# Altium PCB Trottinette_Telemetrie_PCB_2L.PcbDoc
Units mm, origin at the board's own origin, x right, y up, seen from the top; angles counter-clockwise.
Board outline 53 x 36.25 mm, 2 copper layers (Top, Bottom), stack 1.54 mm thick; 43 components, 40 nets, 211 pads, 59 vias.
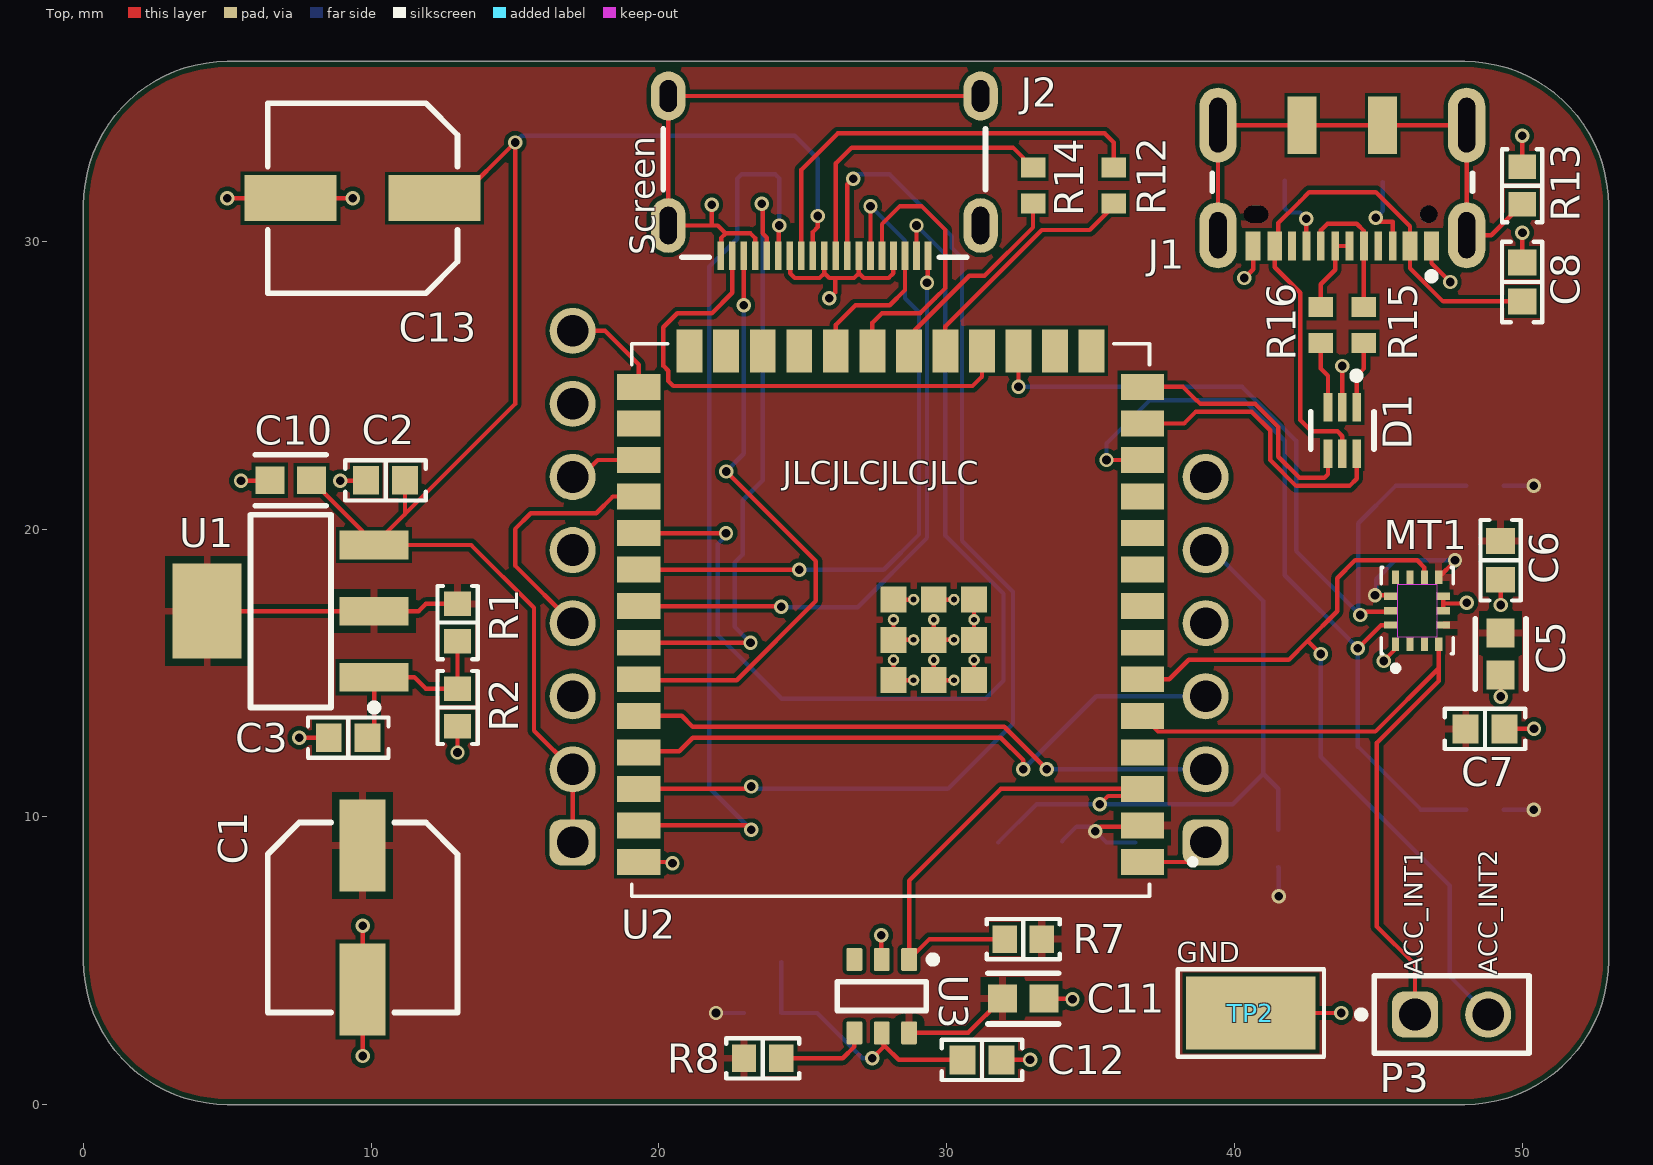
[diagram p0: Top view]
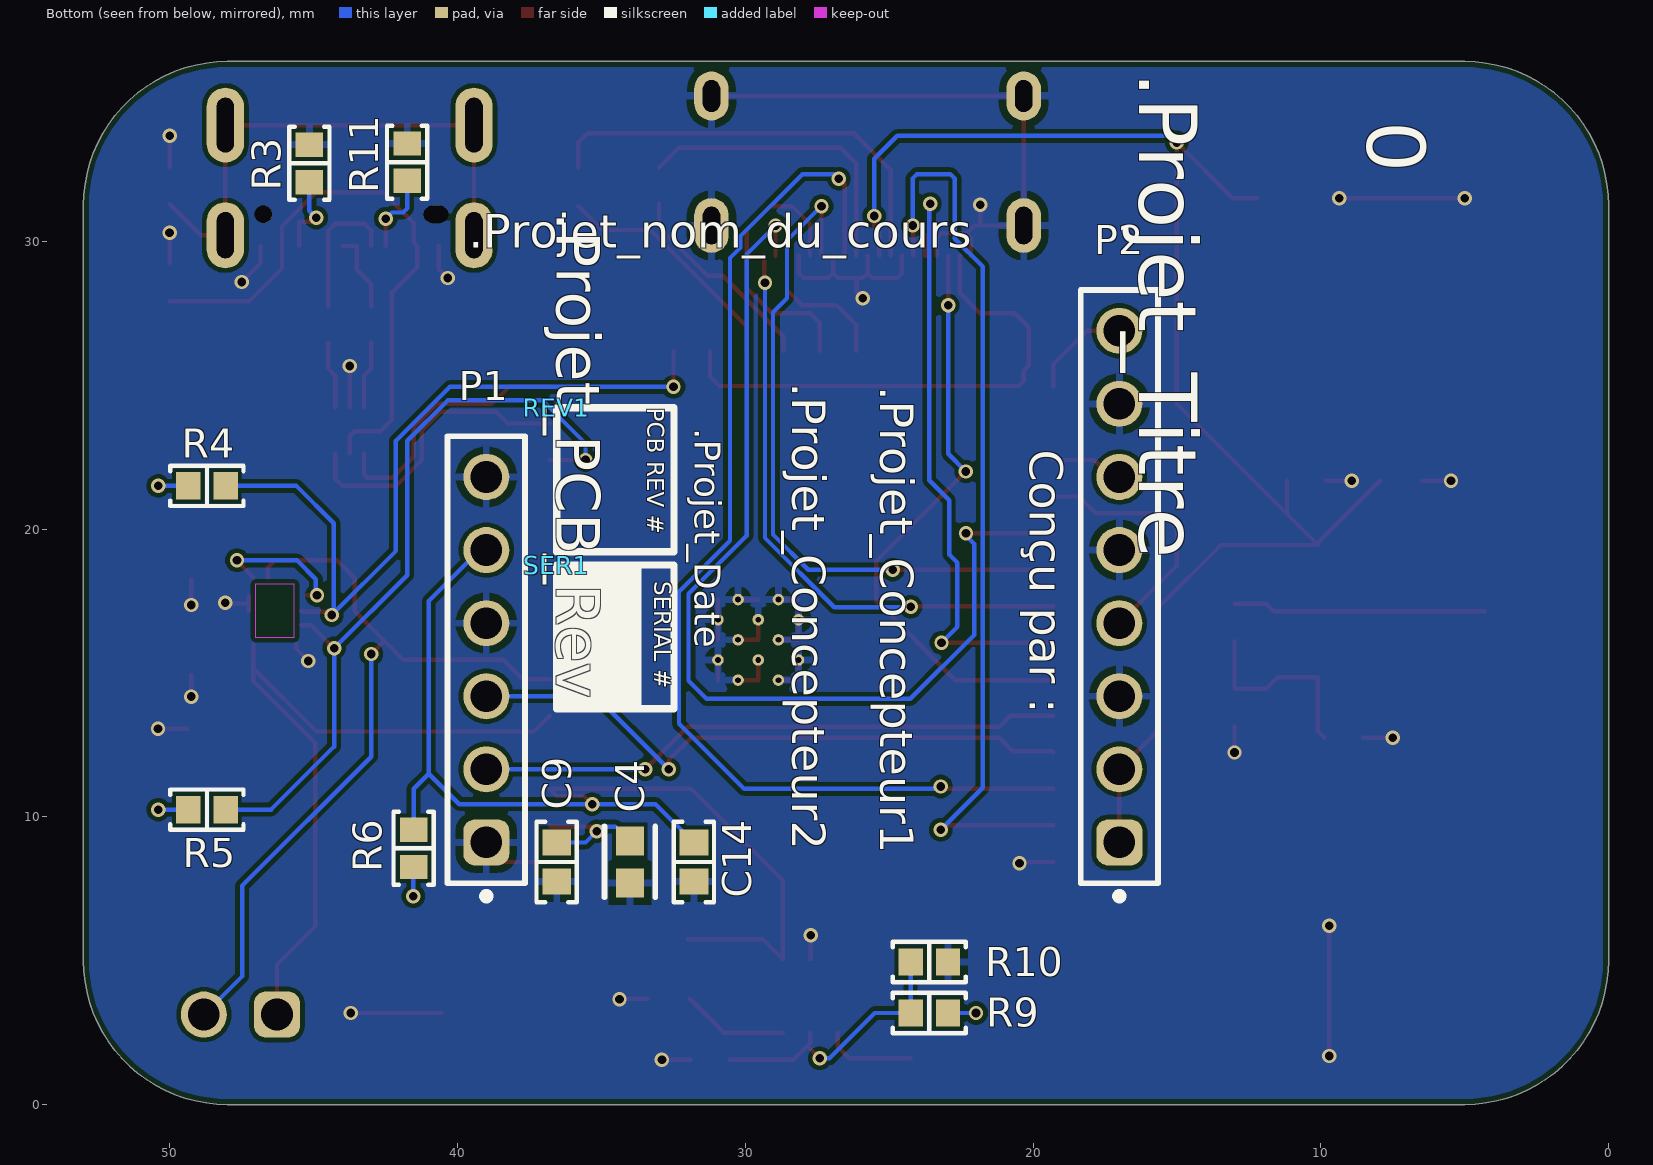
[diagram p1: Bottom view, seen from below]
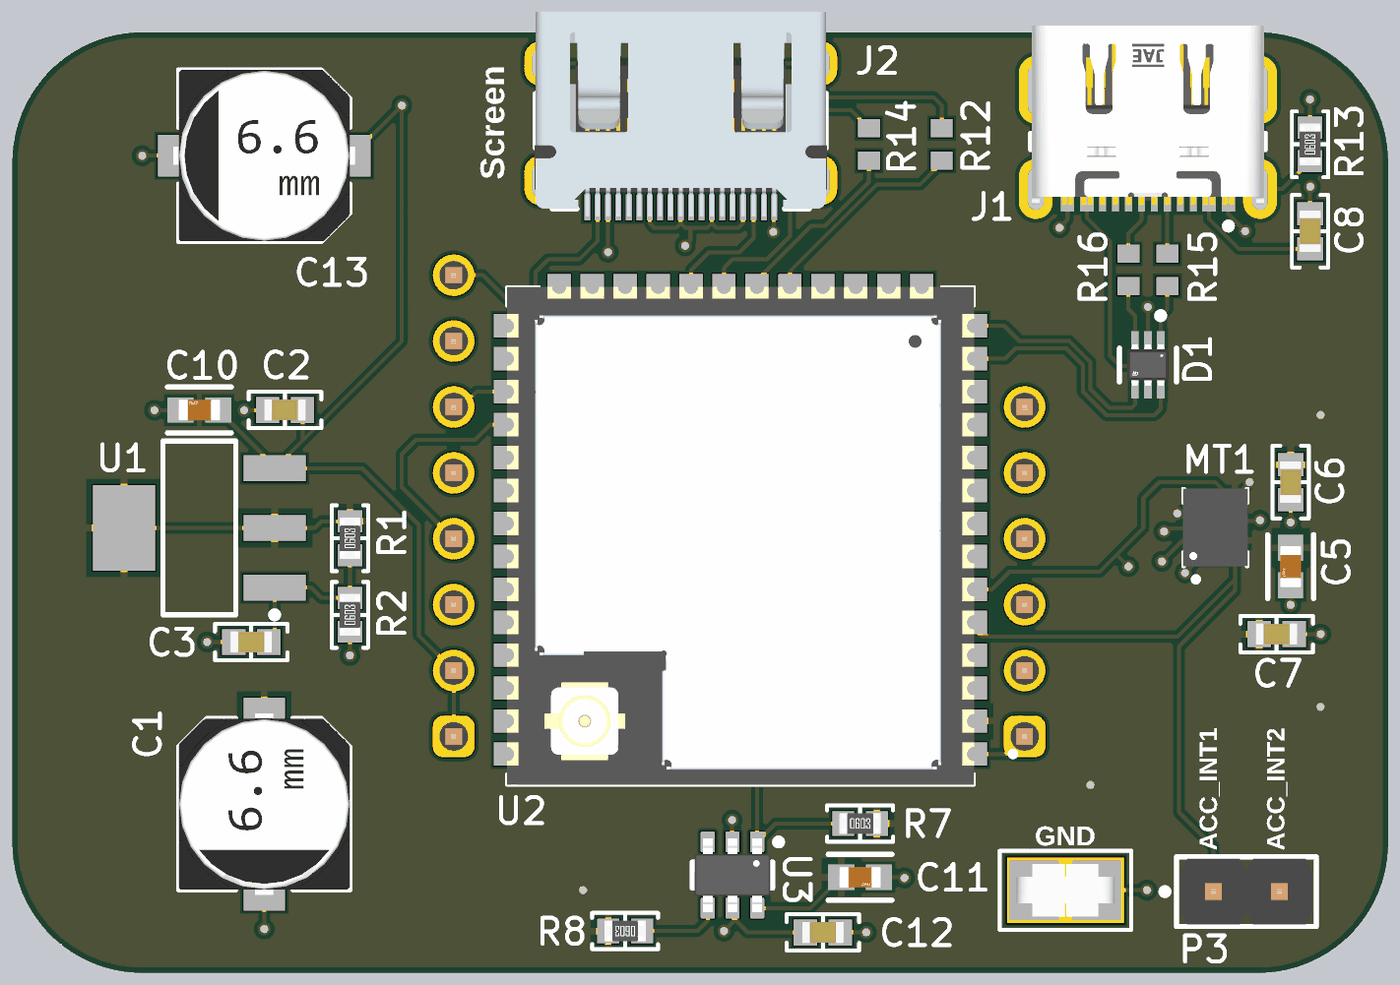
[diagram p2: 3D render of the assembled board from above, using the file's embedded part models]
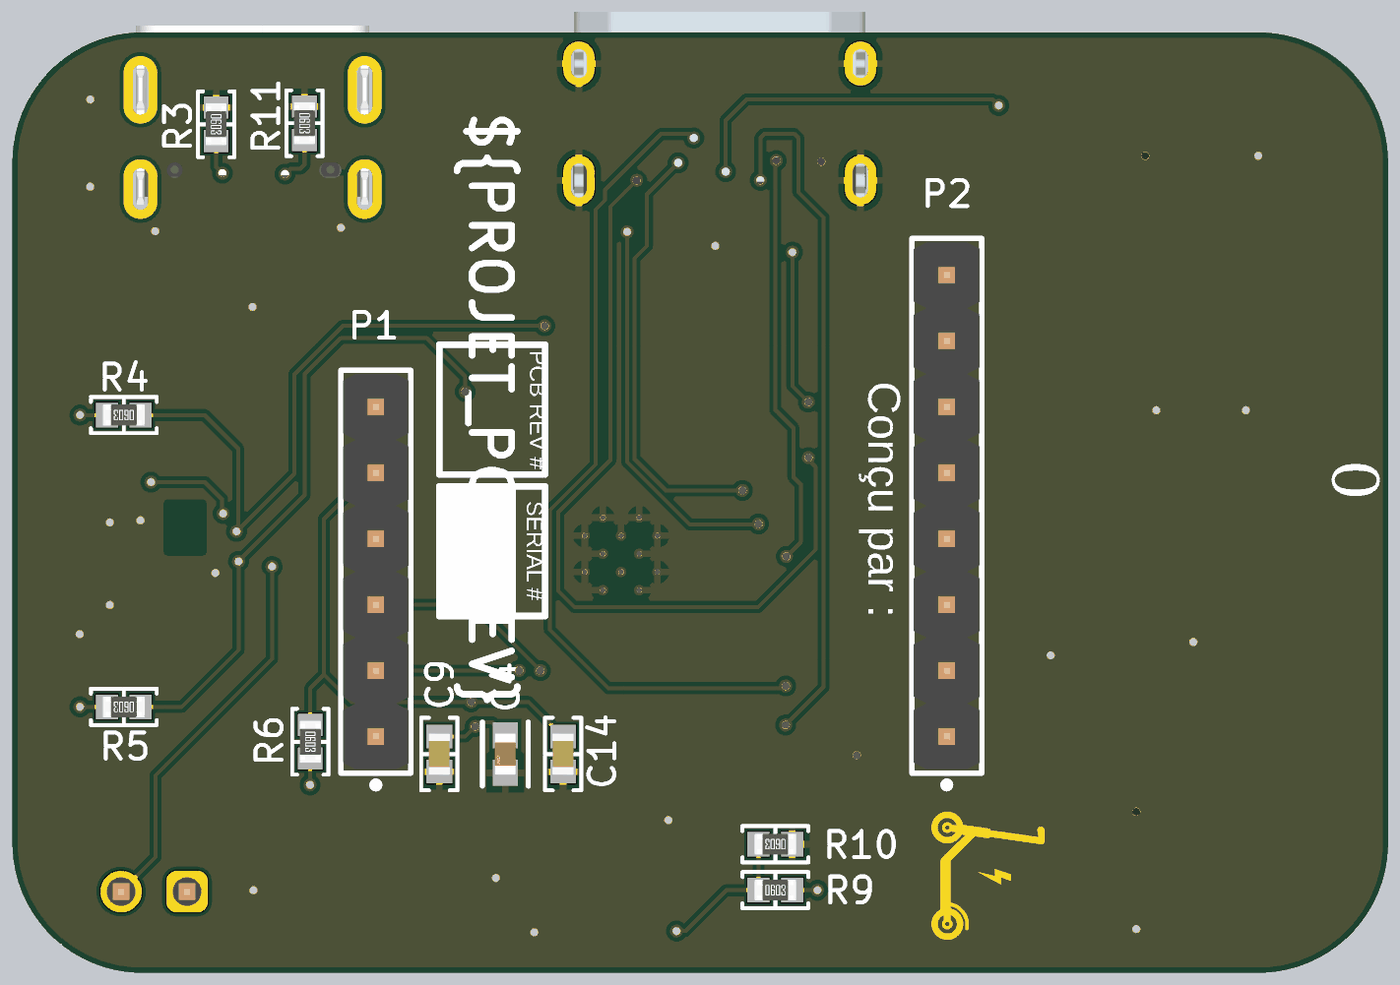
[diagram p3: 3D render of the assembled board from below, using the file's embedded part models]

## Layer stack, top to bottom
Top Solder: solder mask 0.0102, Solder Resist, Dk 3.5
Top: signal copper 0.035
Dielectric 1: core 1.47, FR-4, Dk 4.6
Bottom: signal copper 0.035
Bottom Solder: solder mask 0.0102, Solder Resist, Dk 3.5

## Board outline
0,5 0,31.25 cw(c5,31.25) 5,36.25 48,36.25 cw(c48,31.25) 53,31.25 53,5 cw(c48,5) 48,0 5,0 cw(c5,5)

## Design rules (kind name [scope] priority, off if disabled: settings)
BoardOutlineClearance [All] p1: gap=0.2 ignorepadtopadclearanceinfootprint=FALSE except(0: Arc-SplitContinuation Track-SplitContinuation SMDPad-SplitContinuation THPad-SplitContinuation Via-SplitContinuation Fill-SplitContinuation Poly-SplitContinuation Region-SplitContinuation Text-SplitContinuation)
Clearance [All] p1: gap=0.152 ignorepadtopadclearanceinfootprint=FALSE except(0: Arc-Hole Track-Hole SMDPad-Hole THPad-Hole Via-Hole Fill-Hole Poly-Hole Region-Hole Text-Hole; 0.127: Arc-Arc Arc-Track Track-Track SMDPad-Fill SMDPad-Poly SMDPad-Region; 0.2: Arc-SMDPad Track-SMDPad; 0.254: Arc-Via Track-Via Via-Via; 0.33: Arc-THPad Track-THPad; 0.5: THPad-THPad)
ComponentClearance "Schematic Component Clearance Constraint_1" [InComponent('SER1')] p1: gap=0 collisioncheckmode=3 verticalgap=0 showdistances=FALSE
ComponentClearance "Schematic Component Clearance Constraint" [InComponent('REV1')] p2: gap=0 collisioncheckmode=3 verticalgap=0 showdistances=FALSE
ComponentClearance [All] p3: gap=0.102 collisioncheckmode=3 verticalgap=0.102 showdistances=FALSE
HoleSize [All] p1: absolutevalues=TRUE maxlimit=6.3 minlimit=0.3 maxpercent=80.000 minpercent=20.000
HoleToHoleClearance [All] p1: gap=0.5 allowstackedmicrovias=FALSE
MinimumAnnularRing [All] p1: minimumring=0.13
MinimumSolderMaskSliver [All] p1: minsoldermaskwidth=0.1
PlaneClearance [All] p1: clearance=0.152
PlaneConnect [All] p1: pad.planeconnectstyle=Relief pad.reliefexpansion=0.508 pad.reliefentries=4 pad.reliefconductorwidth=0.254 pad.reliefairgap=0.254 via.planeconnectstyle=Direct via.reliefexpansion=0.508 via.reliefentries=4 via.reliefconductorwidth=0.254 via.reliefairgap=0.254
PolygonConnect [All] p1: thpad.connectstyle=Relief thpad.reliefconductorwidth=0.254 thpad.reliefentries=4 thpad.polygonreliefangle="90 Angle" thpad.airgapwidth=0.254 smdpad.connectstyle=Relief smdpad.reliefconductorwidth=0.254 smdpad.reliefentries=4 smdpad.polygonreliefangle="90 Angle" smdpad.airgapwidth=0.254 via.connectstyle=Direct via.reliefconductorwidth=0.254 via.reliefentries=4 via.polygonreliefangle="90 Angle" via.airgapwidth=0.254
RoutingVias [All] p1: holewidth=0.3 width=0.5 viastyle="Through Hole" minholewidth=0.3 minwidth=0.5 maxholewidth=6.3 maxwidth=6.5
SilkToSilkClearance [All] p1: silktosilkclearance=0.102
SilkToSolderMaskClearance [IsPad] p1: minsilkscreentomaskgap=0.024 clearancetoexposedcopper=FALSE
SolderMaskExpansion SolderMaskExpansion_Via [isVia] p1: expansion=0.102 istentingtop=TRUE
SolderMaskExpansion [All] p2: expansion=0.051 istentingtop=FALSE
SupplyNets "Schematic Supply Nets_3" [InNet('3V3')] p1: voltage=0.000
SupplyNets "Schematic Supply Nets_2" [InNet('GND')] p2: voltage=0.000
SupplyNets "Schematic Supply Nets_1" [InNet('VBUS')] p3: voltage=0.000
SupplyNets "Schematic Supply Nets" [InNet('5V0')] p4: voltage=0.000
Width [All] p1: maxlimit=25.4 minlimit=0.127 preferedwidth=0.152 minimp=50.000000 maximp=50.000000 favimp=50.000000
22 further rules are at their usual default settings.

## Classes and differential pairs
component class Trottinette_Telemetrie_Connectors: C8 C13 D1 J1 J2 P1 P2 R3 R11 R13 R15 R16
component class Trottinette_Telemetrie_Circuit: C1 C2 C3 C5 C6 C7 C9 C10 C11 C12 C14 MT1 P3 R1 R2 R4 R5 R6 R7 R8 R9 R10 R12 R14 TP2 U1 U2 U3
component class Trottinette_Telemetrie_Title: REV1 SER1

## Components (designator, comment, footprint, x,y, rotation, side; value= is the part's Value field where it differs from the comment)
C1 "100 µF" "CAP ALSMD 6.6MM H6.1MM" 9.7,6.5 r270 top
C2 "10 µF" "CAP 0603_1608" 10.499,21.695 r0 top
C3 "10 µF" "CAP 0603_1608" 9.2,12.75 r0 top
C4 "0603ZC104MAT2A" FP-0603-L_1_6_0_15-W_0_81-IPC_B 34.01,8.43 r270 bottom
C5 "0603ZC104MAT2A" FP-0603-L_1_6_0_15-W_0_81-IPC_B 49.25,15.658 r270 top
C6 "10000 pF" "CAP 0603_1608" 49.25,18.914 r90 top
C7 "2.2 µF" "CAP 0603_1608" 48.711,13.054 r180 top
C8 "10 µF" "CAP 0603_1608" 50,28.586 r270 top
C9 "10 µF" "CAP 0603_1608" 36.555,8.43 r90 bottom
C10 "0603ZC104MAT2A" FP-0603-L_1_6_0_15-W_0_81-IPC_B 7.2,21.695 r180 top
C11 "0603ZC104MAT2A" FP-0603-L_1_6_0_15-W_0_81-IPC_B 32.66,3.681 r0 top
C12 "10000 pF" "CAP 0603_1608" 31.225,1.553 r180 top
C13 "100 µF" "CAP ALSMD 6.6MM H6.1MM" 9.7,31.498 r180 top
C14 "10 µF" "CAP 0603_1608" 31.785,8.43 r90 bottom
D1 "USBLC6-2P6" FP-SOT-666-MFG 43.749,23.43 r270 top
J1 "DX07S016JA1R1500" FP-DX07S016JA1R1500-MFG 43.75,33.038 r180 top
J2 "685119136923" 685119136923 25.75,33.25 r180 top
MT1 "ICM-42670-P" XDCR_ICM-42670-P 46.35,17.164 r90 top
P1 "61300611121" 61300611121 39,15.46 r90 bottom
P2 "61300811121" 61300811121 17,18 r90 bottom
P3 "61300211121" 61300211121 47.545,3.127 r0 top
R1 "150 Ohms" "RES 0603_1608" 13,16.75 r90 top
R2 "250 Ohms" "RES 0603_1608" 13,13.797 r90 top
R3 "5.1 k" "RES 0603_1608" 45.15,32.71 r270 bottom
R4 "10k" "RES 0603_1608" 48.711,21.5 r0 bottom
R5 "10k" "RES 0603_1608" 48.711,10.25 r0 bottom
R6 "10k" "RES 0603_1608" 41.524,8.905 r270 bottom
R7 "124 k" "RES 0603_1608" 32.66,5.75 r0 top
R8 "124 k" "RES 0603_1608" 23.605,1.607 r180 top
R9 "63.4 k" "RES 0603_1608" 23.605,3.181 r180 bottom
R10 "10k" "RES 0603_1608" 23.605,4.955 r0 bottom
R11 "5.1 k" "RES 0603_1608" 41.75,32.75 r270 bottom
R12 "ERJ3EKF30R0V" RESC1608X55X30LL15T15 35.805,31.935 r90 top
R13 "0 Ohms" "RES 0603_1608" 50,31.935 r90 top
R14 "ERJ3EKF30R0V" RESC1608X55X30LL15T15 33,31.935 r90 top
R15 "ERJ3EKF30R0V" RESC1608X55X30LL15T15 44.5,27.095 r270 top
R16 "ERJ3EKF30R0V" RESC1608X55X30LL15T15 43,27.095 r270 top
REV1 "Revision Cartridge Mini" REV_REVISION_CARTRIDGE_MINI 36.555,24.211 r270 bottom
SER1 "Serial Cartridge MICRO" SER_SERIAL_CARTRIDGE_MICRO 36.555,18.75 r270 bottom
TP2 "TPO_SMD_5019" TPO_SMD_5019 40.573,3.181 r0 top value="3.81mm x 2.03mm"
U1 "LM1117MPX-ADJ" MP04A_N 7.2,17.147 r180 top
U2 "ESP32-S3-WROOM-1U-N16R8" XCVR_ESP32-S3-WROOM-1U-N16R8 28.05,16.84 r180 top
U3 "TPS3808G01DBVR" DBV0006A_L 27.742,3.766 r270 top

## Footprints (in the part's own frame and the unit in brackets; to place one, negate y for a bottom-side part, rotate by r counter-clockwise, add the part's x,y. Pads: shape width x height; smd on the part's side, far side on the other; paste and mask are expansions set on the pad)
61300211121 [mm] "Pin Header, pitch 2.54 mm, THT, Vertical, single row, 2p"
  rrect50% 1.6x1.6 hole 1.1: 1(-1.27,0)
  round 1.6 hole 1.1: 2(1.27,0)
  silkscreen extent -3.26,-1.35 2.69,1.35, body extent -2.54,-1.27 2.54,1.27, height 8.57
61300611121 [mm] "Pin Header, pitch 2.54 mm, THT, Vertical, single row, 6p"
  rrect50% 1.6x1.6 hole 1.1: 1(-6.35,0)
  round 1.6 hole 1.1: 2(-3.81,0) 3(-1.27,0) 4(1.27,0) 5(3.81,0) 6(6.35,0)
  silkscreen extent -8.34,-1.35 7.77,1.35, body extent -7.62,-1.27 7.62,1.27, height 8.57
61300811121 [mm] "Pin Header, pitch 2.54 mm, THT, Vertical, single row, 8p"
  rrect50% 1.6x1.6 hole 1.1: 1(-8.89,0)
  round 1.6 hole 1.1: 2(-6.35,0) 3(-3.81,0) 4(-1.27,0) 5(1.27,0) 6(3.81,0) 7(6.35,0) 8(8.89,0)
  silkscreen extent -10.88,-1.35 10.31,1.35, body extent -10.16,-1.27 10.16,1.27, height 8.57
685119136923 [mm] "Mini HDMI SMT Horizontal"
  rect 0.23x1 smd: 1(3.6,3.75) 2(3.2,3.75) 3(2.8,3.75) 4(2.4,3.75) 5(2,3.75) 6(1.6,3.75) 7(1.2,3.75) 8(0.8,3.75) 9(0.4,3.75) 10(0,3.75) 11(-0.4,3.75) 12(-0.8,3.75) 13(-1.2,3.75) 14(-1.6,3.75) 15(-2,3.75) 16(-2.4,3.75) 17(-2.8,3.75) 18(-3.2,3.75) 19(-3.6,3.75)
  oval 1.2x1.7 hole 0.6 slot 1.1 at 90 deg: Shell(-5.425,-1.8) Shell(5.425,-1.8)
  oval 1.2x1.9 hole 0.6 slot 1.3 at 90 deg: Shell(-5.425,2.7) Shell(5.425,2.7)
  silkscreen extent -5.6,-0.65 5.6,3.8, body extent -5.62,-3.8 5.63,4.1, height 3.3
"CAP 0603_1608" [mm] "Chip Capacitor, 2-Leads, Body 1.60x0.80mm, IPC Medium Density"
  rect 0.9x1 smd: 1(-0.675,0) 2(0.675,0)
  silkscreen extent -1.4,-0.7 1.4,0.7, body extent -0.8,-0.41 0.8,0.41, height 0.82
"CAP ALSMD 6.6MM H6.1MM" [mm] "Aluminum Electrolytic Capacitor, Body 6.60x6.60x6.10mm, IPC Low Density"
  rect 3.2x1.6 smd: 1(-2.5,0) 2(2.5,0)
  silkscreen extent -3.3,-3.3 3.3,3.3, body extent -3.5,-3.3 3.5,3.3, height 6.1
DBV0006A_L [mm] "SOT23, 6-Leads, Body 3.05x1.75mm, Pitch 0.95mm, IPC High Density"
  rrect18% 0.8x0.55 smd: 1(-1.275,0.95) 2(-1.275,0) 3(-1.275,-0.95) 4(1.275,-0.95) 5(1.275,0) 6(1.275,0.95)
  silkscreen extent -1.4,-1.55 0.5,1.9, body extent -1.42,-1.46 1.42,1.46, height 1.11
FP-0603-L_1_6_0_15-W_0_81-IPC_B [mm]
  rect 1.007x0.968 smd paste+0 mask+0: 1(-0.726,0) 2(0.726,0)
  silkscreen extent -1.23,-0.88 1.23,0.88, body extent -0.8,-0.41 0.8,0.41, height 0.9
FP-DX07S016JA1R1500-MFG [mm]
  rrect100% 1.3x2.3 hole 1.6 slot 0.6 at 0 deg paste-2539.97 mask+0: 1(-4.32,2.825) 2(4.32,2.825)
  rrect100% 1.3x2.6 hole 1.9 slot 0.6 at 0 deg paste-2539.97 mask+0: 3(-4.32,-1) 6(4.32,-1)
  rect 1x2 smd paste+0 mask+0: 4(-1.4,-1) 5(1.4,-1)
  rect 0.52x1 smd paste+0 mask+0: A1/B12(-3.1,3.2) A4/B9(-2.35,3.2) A12/B1(3.1,3.2) B4/A9(2.35,3.2)
  rect 0.27x1 smd paste+0 mask+0: A5(-1.75,3.2) A6(-0.25,3.2) A7(0.75,3.2) A8(1.75,3.2) B5(1.25,3.2) B6(0.25,3.2) B7(-0.75,3.2) B8(-1.25,3.2)
  round 0.6 hole 0.6 unplated paste-2539.97 mask+0: ""(-3,2.1)
  rrect100% 0.85x0.6 hole 0.6 slot 0.85 at 0 deg unplated paste-2539.97 mask+0: ""(3,2.1)
  silkscreen extent -4.52,0.68 4.52,4.37, body extent -5.07,-3.75 5.07,4.08, height 0.25
FP-SOT-666-MFG [mm]
  rect 0.99x0.3 smd paste+0 mask+0: 1(-0.805,0.5) 2(-0.805,0) 3(-0.805,-0.5) 4(0.805,-0.5) 5(0.805,0) 6(0.805,0.5)
  silkscreen extent -2.02,-1.1 0.65,1.1, body extent -1.4,-0.95 1.4,0.95, height 0.25
MP04A_N [mm] "SOT223, 4-Leads, Body 6.5x3.5mm, Pitch 2.3mm, Lead Span 7mm, IPC Medium Density"
  rect 2.4x1 smd: 1(-2.9,2.3) 2(-2.9,0) 3(-2.9,-2.3)
  rect 2.4x3.3 smd: 4(2.9,0)
  silkscreen extent -3.03,-3.35 1.4,3.47, body extent -1.86,-3.35 1.86,3.35, height 1.8
"RES 0603_1608" [mm] "Chip Resistor, 2-Leads, Body 1.60x0.80mm, IPC Medium Density"
  rect 0.85x0.95 smd: 1(-0.65,0) 2(0.65,0)
  silkscreen extent -1.27,-0.7 1.27,0.7, body extent -0.8,-0.4 0.8,0.4, height 0.45
RESC1608X55X30LL15T15 [mm] "Chip Resistor, 2-Leads, Body 1.60x0.80mm, IPC High Density"
  rect 0.7x0.85 smd: 1(-0.625,0) 2(0.625,0)
  body extent -0.87,-0.48 0.87,0.48, height 0.55
REV_REVISION_CARTRIDGE_MINI [mm]
  silkscreen extent 0,0 5,4.08
SER_SERIAL_CARTRIDGE_MICRO [mm]
  silkscreen extent 0,0 5.02,4.08
TPO_SMD_5019 [mm] "PC TEST POINT MINI SMD"
  rect 4.5x2.53 smd paste-5 mask+0.07: 1(0,0)
  silkscreen extent -2.54,-1.52 2.54,1.52, body extent -1.9,-1.01 1.91,1.02, height 2.29
XCVR_ESP32-S3-WROOM-1U-N16R8 [mm]
  rect 1.5x0.9 smd: 1(-8.75,8.41) 2(-8.75,7.14) 3(-8.75,5.87) 4(-8.75,4.6) 5(-8.75,3.33) 6(-8.75,2.06) 7(-8.75,0.79) 8(-8.75,-0.48) 9(-8.75,-1.75) 10(-8.75,-3.02) 11(-8.75,-4.29) 12(-8.75,-5.56) 13(-8.75,-6.83) 14(-8.75,-8.1) 27(8.75,-8.1) 28(8.75,-6.83) 29(8.75,-5.56) 30(8.75,-4.29) 31(8.75,-3.02) 32(8.75,-1.75) 33(8.75,-0.48) 34(8.75,0.79) 35(8.75,2.06) 36(8.75,3.33) 37(8.75,4.6) 38(8.75,5.87) 39(8.75,7.14) 40(8.75,8.41)
  rect 0.9x1.5 smd: 15(-6.985,-9.35) 16(-5.715,-9.35) 17(-4.445,-9.35) 18(-3.175,-9.35) 19(-1.905,-9.35) 20(-0.635,-9.35) 21(0.635,-9.35) 22(1.905,-9.35) 23(3.175,-9.35) 24(4.445,-9.35) 25(5.715,-9.35) 26(6.985,-9.35)
  rect 0.9x0.9 smd: 41_1(-2.9,2.09) 41_2(-1.5,2.09) 41_3(-0.1,2.09) 41_4(-2.9,0.69) 41_5(-1.5,0.69) 41_6(-0.1,0.69) 41_7(-2.9,-0.71) 41_8(-1.5,-0.71) 41_9(-0.1,-0.71)
  round 0.4 hole 0.2 mask+0: 41_10(-2.2,2.09) 41_11(-0.8,2.09) 41_12(-2.9,1.39) 41_13(-1.5,1.39) 41_14(-0.1,1.39) 41_15(-2.2,0.69) 41_16(-0.8,0.69) 41_17(-2.9,-0.01) 41_18(-1.5,-0.01) 41_19(-0.1,-0.01) 41_20(-2.2,-0.71) 41_21(-0.8,-0.71)
  silkscreen extent -10.6,-9.6 9,9.6, body extent -9,-9.6 9,9.6, height 3.35
XDCR_ICM-42670-P [mm]
  rect 0.475x0.25 smd paste-1 mask+0.05: 1(-1.162,0.75) 2(-1.162,0.25) 3(-1.162,-0.25) 4(-1.162,-0.75) 8(1.163,-0.75) 9(1.163,-0.25) 10(1.163,0.25) 11(1.163,0.75)
  rect 0.25x0.475 smd paste-1 mask+0.05: 5(-0.5,-0.913) 6(0,-0.913) 7(0.5,-0.913) 12(0.5,0.912) 13(0,0.912) 14(-0.5,0.912)
  Keep-Out Layer region: 0.925,-0.675 -0.925,-0.675 -0.925,0.675 0.925,0.675
  silkscreen extent -2.1,-1.25 1.5,1.25, body extent -1.5,-1.25 1.5,1.25, height 0.81

## Part data
C1 C13: library part 10SGV100M6.3X6.1, "CAP ALUM 100UF 20% 10V SMD", Device Package="Radial, Can - SMD", Lifetime @ Temp.="2000 Hrs @ 105°C", manufacturer=Rubycon, Operating Temperature="-55°C ~ 105°C", Ratings=AEC-Q200, Ripple Current @ High Frequency="85.2 mA @ 10 kHz", Ripple Current @ Low Frequency="71 mA @ 120 Hz", Supplier Part Number 1=1189-2392-1-ND, Tolerance=±20%, Voltage - Rated="10 V", Applications=Automotive, Capacitance="100 µF", componentlink1description=Datasheet, componentlink1url=http://www.rubycon.co.jp/en/catalog/e_pdfs/aluminum/e_sgv.pdf, componentlink2description="DigiKey Link", componentlink2url=https://www.digikey.com/en/products/detail/rubycon/10SGV100M6-3X6-1/3568604, Height - Seated (Max)="0.240\" (6.10mm)", lastupdated="6/3/2024 8:16:10 PM", Lifecycle Status=Active, Minimum Order=1, Mounting Type="Surface Mount", Package / Case="Radial, Can - SMD", packaging=TapeAndReel, Part Number=10SGV100M6.3X6.1, Part Status=Active, partid=8082, Polarization=Polar, price=0.08, series=SGV, Size / Dimension="0.248\" Dia (6.30mm)", Supplier 1=DigiKey, Surface Mount Land Size="0.260\" L x 0.260\" W (6.60mm x 6.60mm)"
C2 C3 C8 C9 C14: library part GRT188R61A106KE13D, "CAP CER 10UF 10V X5R 0603", Device Package=0603, manufacturer="Murata Electronics", Operating Temperature="-55°C ~ 85°C", Package / Case="0603 (1608 Metric)", Ratings=AEC-Q200, Supplier Part Number 1=490-12311-1-ND, Temperature Coefficient=X5R, Tolerance=±10%, Voltage - Rated=10V, Applications=Automotive, Capacitance="10 µF", componentlink1description=Datasheet, componentlink1url=https://search.murata.co.jp/Ceramy/image/img/A01X/G101/ENG/GRT188R61A106KE13-01.pdf, componentlink2description="DigiKey Link", componentlink2url=https://www.digikey.com/en/products/detail/murata-electronics/GRT188R61A106KE13D/5416733, Features="Derating Recommended", lastupdated="2/9/2024 8:10:30 PM", Lifecycle Status=Active, Minimum Order=1, Mounting Type="Surface Mount, MLCC", packaging=TapeAndReel, Part Number=GRT188R61A106KE13D, Part Status=Active, partid=2522, price=0.06, series=GRT, Size / Dimension="0.063\" L x 0.031\" W (1.60mm x 0.80mm)", Supplier 1=DigiKey, Thickness (Max)="0.037\" (0.95mm)"
C4 C5 C10 C11: library part CMP-2006-04550-2, "General Purpose Ceramic Capacitor, 0603, 100nF, 20%, X7R, 15%, 10V", Capacitance="0.1 µF", Case Code (Imperial)=0603, Case Code (Metric)=1608, Dielectric=X7R, Max Operating Temperature=125°C, Min Operating Temperature=-55°C, Package Quantity=4000, Tolerance=20%, Voltage Rating=10V, Case/Package=0603, Construction=Flat, Depth=0.81mm, Lead Free="Lead Free", Lead Pitch=0.014inch, Length=1.6mm, Mount="Surface Mount", Number of Pins=2, packaging="Tape and Reel", Radiation Hardening=No, RoHS Compliant=Yes, series=-, Termination=SMD/SMT, Thickness=0.035inch, Voltage Rating (DC)=10V, Width=0.032inch
C6: library part C0603C103K4RECAUTO, "CAP CER 0603 10NF 16V X7R 10%", Device Package="0603 (1608 Metric)", manufacturer=KEMET, Operating Temperature="-55°C ~ 125°C", Package / Case=0603, Ratings=AEC-Q200, Supplier Part Number 1=399-17880-1-ND, Temperature Coefficient=X7R, Tolerance=±10%, Voltage - Rated=16V, Applications="Automotive, ESD Protection", Capacitance="10000 pF", componentlink1description=Datasheet, componentlink1url=https://api.kemet.com/component-edge/download/datasheet/C0603C103K4RECAUTO.pdf, componentlink2description="DigiKey Link", componentlink2url=https://www.digikey.com/en/products/detail/kemet/C0603C103K4RECAUTO/8640474, lastupdated="2/9/2024 8:10:22 PM", Lifecycle Status=Active, Minimum Order=1, Mounting Type="Surface Mount, MLCC", packaging=TapeAndReel, Part Number=C0603C103K4RECAUTO, Part Status=Active, partid=8251, price=0.01, series="ESD SMD Auto X7R", Size / Dimension="0.063\" L x 0.031\" W (1.60mm x 0.80mm)", Supplier 1=DigiKey, Thickness (Max)="0.034\" (0.87mm)"
C7: library part CC0603ZRY5V7BB225, "CAP CER 2.2UF 16V Y5V 0603", Device Package="0603 (1608 Metric)", manufacturer=Yageo, Operating Temperature="-30°C ~ 85°C", Package / Case=0603, Supplier Part Number 1=311-3416-1-ND, Temperature Coefficient="Y5V (F)", Tolerance="-20%, +80%", Voltage - Rated=16V, Applications="General Purpose", Capacitance="2.2 µF", componentlink1description=Datasheet, componentlink1url=http://www.yageo.com/documents/recent/UPY-GPHC_Y5V_6.3V-to-50V_8.pdf, componentlink2description="DigiKey Link", componentlink2url=https://www.digikey.com/en/products/detail/yageo/CC0603ZRY5V7BB225/5883851, lastupdated="2/9/2024 8:10:30 PM", Lifecycle Status=Active, Minimum Order=1, Mounting Type="Surface Mount, MLCC", packaging=TapeAndReel, Part Number=CC0603ZRY5V7BB225, Part Status=Active, partid=2203, price=0.01, series=CC, Size / Dimension="0.063\" L x 0.031\" W (1.60mm x 0.80mm)", Supplier 1=DigiKey, Thickness (Max)="0.035\" (0.90mm)"
C12: library part AC0603KRX7R0BB103, "CAP CER 10000PF 100V X7R 0603", Device Package=0603, manufacturer=Yageo, Operating Temperature="-55°C ~ 125°C", Package / Case="0603 (1608 Metric)", Ratings=AEC-Q200, Supplier Part Number 1=311-3100-1-ND, Temperature Coefficient=X7R, Tolerance=±10%, Voltage - Rated=100V, Applications=Automotive, Capacitance="10000 pF", componentlink1description=Datasheet, componentlink1url=http://www.yageo.com/NewPortal/_en/search/productDocs.jsp?YageoPartNumber=AC0603KRX7R0BB103, componentlink2description="DigiKey Link", componentlink2url=https://www.digikey.com/en/products/detail/yageo/AC0603KRX7R0BB103/6643086, lastupdated="2024-02-09 20:10:30", Lifecycle Status=Active, Minimum Order=1, Mounting Type="Surface Mount, MLCC", packaging=TapeAndReel, Part Number=AC0603KRX7R0BB103, Part Status=Active, partid=2218, price=0.01, series=AC, Size / Dimension="0.063\" L x 0.031\" W (1.60mm x 0.80mm)", Supplier 1=DigiKey, Thickness (Max)="0.035\" (0.90mm)"
D1: library part CMP-12225-000058-1, "TVS DIODE 5.25V 17V SOT666", Breakdown Voltage=6V, Capacitance=3.5pF, Case/Package=SOT-666, Clamping Voltage=17V, Leakage Current=150nA, Max Operating Temperature=125°C, Min Operating Temperature=-40°C, Operating Supply Voltage=5V, Package Quantity=1, Peak Pulse Current=5A, Power Line Protection=Yes, Test Current=1mA, Contact Plating=Tin, Depth=1.3mm, Direction=Unidirectional, Element Configuration=Dual, ESD Protection=Yes, Height=0.6mm, Lead Free="Lead Free", Length=1.7mm, Max Breakdown Voltage=6V, Max Reverse Leakage Current=150nA, Min Breakdown Voltage=6V, Mount="Surface Mount", Number of Bidirectional Channels=2, Number of Channels=2, Number of Elements=1, Number of Pins=6, packaging="Tape and Reel", Polarity=Unidirectional, Radiation Hardening=No, REACH SVHC="No SVHC", Reverse Breakdown Voltage=6V, Reverse Standoff Voltage=5V, Termination=SMD/SMT, Width=1.3mm, Working Voltage=5V
J1: library part CMP-19038-000003-1, "CONN RCP USB2.0 TYP C 24P SMD RA"
J2: library part CMP-1502-00171-2, Contact Resistance=30mΩ, Current Rating=500mA, Insulation Resistance=100MΩ, Max Operating Temperature=85°C, Min Operating Temperature=-25°C, Operating Supply Voltage=40V, Body Material=Brass, Connector Type=HDMI, Contact Material=Gold, Contact Plating=Gold, Features=Shielded, Gender=Receptacle, Height=3.45mm, Lead Free="Lead Free", Mount="Horizontal, Surface Mount", NexarPartId=19499823, Number of Contacts=19, Number of Pins=19, Number of Positions=19, Orientation=Horizontal, packaging="Tape and Reel", REACH SVHC=Unknown, RoHS=Compliant, Termination=SMD/SMT, Voltage Rating=40V
MT1: Package=None, Availability=Unavailable, MP=ICM-42670-P, price=None
P1: "WR-PHD Pin Header, THT, Vertical, pitch 2.54mm, 1 Row, 6P", Contact Resistance=20mOhm, manufacturer="Wurth Elektronik", Operating Temperature Max=105°C, Operating Temperature Min=-40°C, Rated Current=3A, Withstanding Voltage=500V, Working Voltage=250V, Category="Board-to-Board Connectors", componentlink1description="Website Link", componentlink1url=https://www.we-online.com/redexpert/article/61300611121?ad, componentlink2description="Datasheet Link", componentlink2url=https://www.we-online.com/redexpert/spec/61300611121?ad, Gender="Pin Header", Manufacturer Part Number=61300611121, Match Code=WR-PHD, Mount="Through Hole", Number of Pins=6, Number of Rows=1, Orientation=Vertical, packaging=Bag, Pitch=2.54mm
P2: "WR-PHD Pin Header, THT, Vertical, pitch 2.54mm, 1 Row, 8P", Contact Resistance=20mOhm, manufacturer="Wurth Elektronik", Operating Temperature Max=105°C, Operating Temperature Min=-40°C, Rated Current=3A, Withstanding Voltage=500V, Working Voltage=250V, Category="Board-to-Board Connectors", componentlink1description="Website Link", componentlink1url=https://www.we-online.com/redexpert/article/61300811121?ad, componentlink2description="Datasheet Link", componentlink2url=https://www.we-online.com/redexpert/spec/61300811121?ad, Gender="Pin Header", Manufacturer Part Number=61300811121, Match Code=WR-PHD, Mount="Through Hole", Number of Pins=8, Number of Rows=1, Orientation=Vertical, packaging=Bag, Pitch=2.54mm
P3: "WR-PHD Pin Header, THT, Vertical, pitch 2.54mm, 1 Row, 2P", Contact Resistance=20mOhm, manufacturer="Wurth Elektronik", Operating Temperature Max=105°C, Operating Temperature Min=-40°C, Rated Current=3A, Withstanding Voltage=500V, Working Voltage=250V, Category="Board-to-Board Connectors", componentlink1description="Website Link", componentlink1url=https://www.we-online.com/redexpert/article/61300211121?ad, componentlink2description="Datasheet Link", componentlink2url=https://www.we-online.com/redexpert/spec/61300211121?ad, Gender="Pin Header", Manufacturer Part Number=61300211121, Match Code=WR-PHD, Mount="Through Hole", Number of Pins=2, Number of Rows=1, Orientation=Vertical, packaging=Bag, Pitch=2.54mm
R1: library part RMCF0603FT150R, "RES 150 OHM 1% 1/10W 0603", Device Package="0603 (1608 Metric)", manufacturer="Stackpole Electronics Inc", Operating Temperature="-55°C ~ 155°C", Power (Watts)="0.1W, 1/10W", Ratings=AEC-Q200, Supplier Device Package=0603, Supplier Part Number 1=RMCF0603FT150RCT-ND, Temperature Coefficient=±100ppm/°C, Tolerance=±1%, componentlink1description=Datasheet, componentlink1url=https://www.seielect.com/catalog/sei-rmcf_rmcp.pdf, componentlink2description="DigiKey Link", componentlink2url=https://www.digikey.com/en/products/detail/stackpole-electronics-inc/RMCF0603FT150R/1761314, Composition="Thick Film", Features="Automotive AEC-Q200", Height - Seated (Max)="0.022\" (0.55mm)", lastupdated="2/9/2024 8:43:14 PM", Lifecycle Status=Active, Minimum Order=1, Number of Terminations=2, Package / Case="0603 (1608 Metric)", packaging=CutTape, Part Number=RMCF0603FT150R, Part Status=Active, partid=10675, price=0.01, Resistance="150 Ohms", series=RMCF, Size / Dimension="0.061\" L x 0.031\" W (1.55mm x 0.80mm)", Supplier 1=DigiKey
R2: library part CH0603-250RJNTA, "RES 250 OHM 5% 1/8W 0603", Device Package="0603 (1608 Metric)", manufacturer="Vishay Sfernice", Operating Temperature="-55°C ~ 155°C", Power (Watts)="0.125W, 1/8W", Supplier Device Package=0603, Supplier Part Number 1=716-1168-1-ND, Temperature Coefficient=±100ppm/°C, Tolerance=±5%, componentlink1description=Datasheet, componentlink1url=http://www.vishay.com/docs/53014/ch.pdf, componentlink2description="DigiKey Link", componentlink2url=https://www.digikey.com/en/products/detail/vishay-sfernice/CH0603-250RJNTA/9405751, Composition="Thin Film", Features="RF, High Frequency", Height - Seated (Max)="0.025\" (0.63mm)", lastupdated="2/9/2024 8:43:16 PM", Lifecycle Status=Active, Minimum Order=1, Number of Terminations=2, Package / Case="0603 (1608 Metric)", packaging=TapeAndReel, Part Number=CH0603-250RJNTA, Part Status=Active, partid=10119, price=2.39, Resistance="250 Ohms", series=CH, Size / Dimension="0.060\" L x 0.030\" W (1.52mm x 0.76mm)", Supplier 1=DigiKey
R3 R11: library part RMCF0603FT5K10, "RES 5.1K OHM 1% 1/10W 0603", Device Package="0603 (1608 Metric)", manufacturer="Stackpole Electronics Inc", Operating Temperature="-55°C ~ 155°C", Package / Case=0603, Power (Watts)="0.1W, 1/10W", Ratings=AEC-Q200, Resistance="5.1 kOhms", Supplier Part Number 1=RMCF0603FT5K10CT-ND, Temperature Coefficient=±100ppm/°C, Tolerance=±1%, componentlink1description=Datasheet, componentlink1url=https://www.seielect.com/catalog/sei-rmcf_rmcp.pdf, componentlink2description="DigiKey Link", componentlink2url=https://www.digikey.com/en/products/detail/stackpole-electronics-inc/RMCF0603FT5K10/1760908, Composition="Thick Film", Features="Automotive AEC-Q200", Height - Seated (Max)="0.022\" (0.55mm)", lastupdated="2/9/2024 8:43:14 PM", Lifecycle Status=Active, Minimum Order=1, Number of Terminations=2, packaging=CutTape, Part Number=RMCF0603FT5K10, Part Status=Active, partid=10617, price=0.01, series=RMCF, Size / Dimension="0.061\" L x 0.031\" W (1.55mm x 0.80mm)", Supplier 1=DigiKey
R4 R5 R6 R10: library part RNCS0603BKE10K0, "RES 10K OHM 0.1% 1/16W 0603", Device Package="0603 (1608 Metric)", manufacturer="Stackpole Electronics Inc", Operating Temperature="-55°C ~ 155°C", Power (Watts)="0.063W, 1/16W", Ratings=AEC-Q200, Resistance="10 kOhms", Supplier Device Package=0603, Supplier Part Number 1=RNCS0603BKE10K0CT-ND, Temperature Coefficient=±25ppm/°C, Tolerance=±0.1%, componentlink1description=Datasheet, componentlink1url=https://www.seielect.com/catalog/sei-rncs_rnch.pdf, componentlink2description="DigiKey Link", componentlink2url=https://www.digikey.com/en/products/detail/stackpole-electronics-inc/RNCS0603BKE10K0/1708836, Composition="Thin Film", Features="Anti-Corrosive, Automotive AEC-Q200, Moisture Resistant", Height - Seated (Max)="0.022\" (0.55mm)", lastupdated="2/9/2024 8:43:37 PM", Lifecycle Status=Active, Minimum Order=1, Number of Terminations=2, Package / Case="0603 (1608 Metric)", packaging=TapeAndReel, Part Number=RNCS0603BKE10K0, Part Status=Active, partid=4838, price=0.06, series=RNCS, Size / Dimension="0.061\" L x 0.031\" W (1.55mm x 0.80mm)", Supplier 1=DigiKey
R7 R8: library part RMCF0603FT124K, "RES 124K OHM 1% 1/10W 0603", Device Package="0603 (1608 Metric)", manufacturer="Stackpole Electronics Inc", Operating Temperature="-55°C ~ 155°C", Power (Watts)="0.1W, 1/10W", Ratings=AEC-Q200, Resistance="124 kOhms", Supplier Device Package=0603, Supplier Part Number 1=RMCF0603FT124KCT-ND, Temperature Coefficient=±100ppm/°C, Tolerance=±1%, componentlink1description=Datasheet, componentlink1url=https://www.seielect.com/catalog/sei-rmcf_rmcp.pdf, componentlink2description="DigiKey Link", componentlink2url=https://www.digikey.com/en/products/detail/stackpole-electronics-inc/RMCF0603FT124K/1761224, Composition="Thick Film", Features="Automotive AEC-Q200", Height - Seated (Max)="0.022\" (0.55mm)", lastupdated="2/9/2024 8:43:13 PM", Lifecycle Status=Active, Minimum Order=1, Number of Terminations=2, Package / Case="0603 (1608 Metric)", packaging=CutTape, Part Number=RMCF0603FT124K, Part Status=Active, partid=10853, price=0.01, series=RMCF, Size / Dimension="0.061\" L x 0.031\" W (1.55mm x 0.80mm)", Supplier 1=DigiKey
R9: library part RMCF0603FT63K4, "RES 63.4K OHM 1% 1/10W 0603", Device Package="0603 (1608 Metric)", manufacturer="Stackpole Electronics Inc", Operating Temperature="-55°C ~ 155°C", Power (Watts)="0.1W, 1/10W", Ratings=AEC-Q200, Resistance="63.4 kOhms", Supplier Device Package=0603, Supplier Part Number 1=RMCF0603FT63K4CT-ND, Temperature Coefficient=±100ppm/°C, Tolerance=±1%, componentlink1description=Datasheet, componentlink1url=https://www.seielect.com/catalog/sei-rmcf_rmcp.pdf, componentlink2description="DigiKey Link", componentlink2url=https://www.digikey.com/en/products/detail/stackpole-electronics-inc/RMCF0603FT63K4/1714177, Composition="Thick Film", Features="Automotive AEC-Q200", Height - Seated (Max)="0.022\" (0.55mm)", lastupdated="2/9/2024 8:43:20 PM", Lifecycle Status=Active, Minimum Order=1, Number of Terminations=2, Package / Case="0603 (1608 Metric)", packaging=CutTape, Part Number=RMCF0603FT63K4, Part Status=Active, partid=8895, price=0.01, series=RMCF, Size / Dimension="0.061\" L x 0.031\" W (1.55mm x 0.80mm)", Supplier 1=DigiKey
R12 R14 R15 R16: library part CMP-2000-00423-1, manufacturer=Panasonic, Part Number=ERJ3EKF30R0V
R13: library part JR0603X26E, "0603 26 AMP JUMPER", Device Package="0603 (1608 Metric)", manufacturer=Ohmite, Operating Temperature="-55°C ~ 150°C", Power (Watts)=0.135W, Supplier Device Package=0603, Supplier Part Number 1=JR0603X26ECT-ND, Tolerance=Jumper, componentlink1description=Datasheet, componentlink1url=https://www.ohmite.com/assets/docs/res_jr.pdf?r=false, componentlink2description="DigiKey Link", componentlink2url=https://www.digikey.com/en/products/detail/ohmite/JR0603X26E/10233371, Composition="Metal Element", Height - Seated (Max)="0.022\" (0.55mm)", lastupdated="2/9/2024 8:43:29 PM", Lifecycle Status=Active, Minimum Order=1, Number of Terminations=2, Package / Case="0603 (1608 Metric)", packaging=TapeAndReel, Part Number=JR0603X26E, Part Status=Active, partid=6812, price=0.10, Resistance="0 Ohms", series=JR, Size / Dimension="0.063\" L x 0.031\" W (1.60mm x 0.80mm)", Supplier 1=DigiKey
REV1: library part REV_REVISION_CARTRIDGE_MINI, "REV - REVISION CARTRIDGE MINI", Assembly Type=NONE, Rule="Component Clearance Constraint [Horizontal Clearance = 0mil    Vertical Clearance = 0mil]"
SER1: library part SER_SERIAL_CARTRIDGE_MICRO, "SER - SERIAL CARTRIDGE MICRO", Assembly Type=NONE, Rule="Component Clearance Constraint [Horizontal Clearance = 0mil    Vertical Clearance = 0mil]"
TP2: library part CMP-007-000000-1, "TPO - PC TEST POINT MINI - SMD", Manufacturer #1="Keystone Electronics", Package=SMD, Part Number #1=5019, Assembly Type=SMD, Component Type=Standard, Design Item ID=TPO_SMD_5019, HelpURL=https://www.digikey.ca/product-detail/en/keystone-electronics/5019/36-5019CT-ND/3907344, Pin Count=1, Polarized=No, Source=CEGEP_SHERBROOKE_TGE_LIBRARY.SchLib
U1: library part CMP-0062-01642-3, "800mA Low-Dropout Linear Regulator, 4-pin SOT-223", manufacturer="National Semiconductor", PackageTopMarking=XYTT*N03A, PowerWise=N, Code_IPC=SOT223-4, Code_JEDEC=TO-261-AA, componentlink1description="Manufacturer URL", componentlink1url=http://www.national.com/, componentlink2description="LM1117 Datasheet", componentlink2url=http://www.national.com/ds/LM/LM1117.pdf, ComponentLink3Description="LM1117 Web Page", ComponentLink3URL=http://www.national.com/pf/LM/LM1117.html, ComponentLink4Description="MP04A Package Page", ComponentLink4URL=http://www.national.com/packaging/folders/mp04a.html, CompType="LDO IC", DatasheetVersion=Apr-2006, High-Reliability=Y, PackageDescription="Molded SOT-223, 6.50 x 3.56 x 1.6mm Body, 4 Lead, 2.3mm Pitch", PackageReference=MP04A, PackageVersion="revB, Apr-2003", PartNumber=LM1117MPX-ADJ, PinCount=4, RevisionNote="SCH symbol layout adjusted", RoHS=N
U2: "Bluetooth, WiFi 802.11b/g/n, Bluetooth v5.0 Transceiver Module 2.4GHz Antenna Not Included, U.FL Surface Mount", Package=None, Availability=Unavailable, Check_prices=https://www.snapeda.com/parts/ESP32-S3-WROOM-1U-N16R8/Espressif+Systems/view-part/?ref=eda, MF="Espressif Systems", MP=ESP32-S3-WROOM-1U-N16R8, price=None, SnapEDA_Link=https://www.snapeda.com/parts/ESP32-S3-WROOM-1U-N16R8/Espressif+Systems/view-part/?ref=snap
U3: library part CMP-0332-00558-2, "Low Quiescent Current, Programmable-Delay Supervisory Circuit, 1 Supply Monitored, -40 to 125 degC, 6-pin SOT-23 (DBV), Green (RoHS & no Sb/Br)", manufacturer="Texas Instruments", Rating=Catalog, Threshold Voltage 1 (typ)(Typ)(V)=Adjustable, # of Supplies Monitored=1, Code_JEDEC=MO-178-AB*, componentlink1description=Datasheet, componentlink1url=http://www.ti.com/general/docs/lit/getliterature.tsp?genericPartNumber=TPS3808G01&fileType=pdf, DatasheetVersion=SBVS050J, Iq(Typ)(uA)=2.4, Mounting Technology="Surface Mount", Output Driver Type / Reset Output="Active-low, Open-drain", PackageDescription="6-Pin Plastic Small-Outline Package, 2.9 x 1.6 mm Body, 0.95 mm Pitch, 2.8 mm Lead Span", PackageReference=DBV0006A, PackageVersion="revK, Mar-2006", PartNumber=TPS3808G01DBVR, Reset Threshold Accuracy(%)=1, SubFamily="Supervisor and Reset IC", Time Delay(ms)=Programmable, VCC(Max)(V)=6.5, VCC(Min)(V)=1.7

## Via types
v1: diameter 0.5, hole 0.3, Top to Bottom, tented both sides, 59 vias

## Nets (pads, with @x,y where several pads share a name; then routed paths per layer and width w, separated by ;. In a path a pad name is that pad's centre, name@x,y a point inside that pad or via, vN(x,y) a via of type N, cw(c..) or ccw(c..) an arc to the next point about the centre after c; other vN are vias at no path point)
3V3: C1.1 C4.1 C5.1 C6.2 C7.2 C9.2 C11.1 MT1.5 MT1.8 MT1.12 R1.2 R4.2 R5.2 R6.2 R7.2 R8.2 R9.2 U1.2 U1.4 U2.2 U3.6 | length 26.1
  Top w0.152: U1.4 U1.2 11.647,17.147 11.9,17.4 R1.2 ; U3.6 30.744,2.491 C11.1 ; v1(35.165,9.494) 35.33,9.659 36.759,9.659 U2.2 ; v1(44.884,17.703) MT1.12@45.238,17.703 ; MT1.8 47.665,18.892 v1(47.665,18.914)
  Bottom w0.152: v1(21.983,3.181) R9.2 ; C4.1 34.513,9.659 35,9.659 35.554,9.105 C9.2 ; R6.2 41.535,8.245 v1(41.535,7.24) ; v1(44.884,17.703) 44.925,17.744 44.925,18.258 45.581,18.914 46.867,18.914 v1(47.665,18.914) ; R5.2 v1(50.4,10.25) ; R4.2 v1(50.4,21.5)
5V0: C2.2 C10.1 C13.1 J2.9 P2.1 P2.2 U1.3 | length 55
  Top w0.152: C10.1 10.1,19.521 U1.3 ; C2.2 11.174,20.521 U1.3 ; C13.1 13.063,31.498 v1(15,33.435) 15,24.347 U1.3 ; P2.1 P2.2 15.655,12.995 15.655,17.263 13.471,19.447 U1.3 ; J2.9 25.35,30.326 25.521,30.497 v1(25.521,30.881)
  Bottom w0.152: v1(15,33.435) 15.232,33.667 24.721,33.667 25.521,32.866 v1(25.521,30.881)
\RESET: C14.2 P1.5 R6.1 R7.1 U2.3 U3.1 | length 38.6
  Top w0.152: R7.1 29.402,5.75 U3.1 28.692,7.781 31.881,10.97 U2.3 36.555,10.725 35.609,10.725 v1(35.324,10.44)
  Bottom w0.152: C14.2 33.12,10.44 v1(35.324,10.44) 39.94,10.44 41,11.5 ; P1.5 39.23,19.27 41,17.5 41,11.5 ; R6.1 41.524,10.976 41,11.5
ACC_INT1: MT1.4 P3.1 U2.5 | length 25.8
  Top w0.152: U2.5 37.344,12.966 37.664,12.966 37.667,12.964 44.9,12.964 47.1,15.164 ; P3.1 46.275,4.863 44.949,6.189 44.949,12.568 47.1,14.719 47.1,15.164 ; MT1.4 47.1,15.164
ACC_INT2: MT1.9 P3.2 U2.6 | length 28.2
  Top w0.152: U2.6 37.73,14.78 38.41,15.46 41.892,15.46 42.525,16.093 ; v1(43,15.658) 42.565,16.093 42.525,16.093 ; MT1.9 46.6,18.664 46.35,18.914 44.192,18.914 43.572,18.294 43.572,17.14 42.525,16.093
  Bottom w0.152: v1(43,15.658) 43,12.089 47.489,7.601 47.489,4.453 P3.2
BOOT: P2.8 U2.27 | length 3.6
  Top w0.152: P2.8 18.125,26.89 19.3,25.715 U2.27
CON_GPIO18: P2.4 U2.30 | length 8.9
  Top w0.152: P2.4 15,18.73 15,20 15.548,20.548 17.817,20.548 18.4,21.13 U2.30
CON_GPIO21: P2.6 U2.29 | length 2.5
  Top w0.152: P2.6 17.282,21.81 17.872,22.4 U2.29
DC_PIN: J2.5 U2.34 | length 21.7
  Top w0.152: U2.34 v1(23.179,16.05) ; v1(23.57,31.31) 23.605,31.275 23.605,30.275 23.75,30.129 J2.5
  Bottom w0.152: v1(23.179,16.05) 22.627,16.602 22.627,18.83 22.91,19.114 22.91,21 23.605,21.695 23.605,31.275 v1(23.57,31.31)
GND: C1.2 C2.1 C3.1 C4.2 C5.2 C6.1 C7.1 C8.1 C9.1 C10.2 C11.2 C12.1 C13.2 C14.1 D1.2 J1.A1/B12 J1.A12/B1 J2.1 J2.4 J2.7 J2.10 J2.13 J2.16 J2.Shell MT1.1 MT1.6 MT1.7 P1.1 P1.4 P1.6 P2.3 P2.5 P2.7 R2.1 R3.1 R10.1 R11.1 R13.2 TP2.1 U2.1 U2.40 U2.41_1 U2.41_2 U2.41_3 U2.41_4 U2.41_5 U2.41_6 U2.41_7 U2.41_8 U2.41_9 U2.41_10 U2.41_11 U2.41_12 U2.41_13 U2.41_14 U2.41_15 U2.41_16 U2.41_17 U2.41_18 U2.41_19 U2.41_20 U2.41_21 U3.2 | length 70.5
  Top w0.152: v1(5,31.498) C13.2 v1(9.359,31.498) ; v1(5.473,21.684) 6.463,21.684 C10.2 ; v1(7.5,12.75) C3.1 ; v1(8.927,21.684) 9.814,21.684 C2.1 ; v1(9.7,1.687) C1.2 v1(9.7,6.208) ; v1(13,12.235) R2.1 ; U2.40 20.421,8.43 v1(20.471,8.38) ; v1(21.84,31.275) 21.84,30.55 ; J2.1 22.159,29.5 22.159,30.114 22.321,30.276 ; J2.4 23.341,29.5 23.341,30.114 23.179,30.276 22.721,30.276 22.321,30.276 ; J2.7 24.559,29.5 24.559,28.886 24.721,28.724 25.121,28.724 25.579,28.724 25.741,28.886 25.741,29.5 J2.10 J2.10@25.759,29.5 ; 25.759,28.886 25.921,28.724 26.121,28.724 ; v1(25.921,28.022) 26.121,28.222 26.121,28.724 ; J2.13 26.941,29.5 26.941,28.886 26.779,28.724 26.321,28.724 26.121,28.724 ; 26.959,28.886 27.121,28.724 27.521,28.724 27.979,28.724 28.141,28.886 28.141,29.5 J2.16 ; v1(27.728,5.884) 27.728,5.055 U3.2 ; U2.41_14 U2.41_3 U2.41_11 ; U2.41_19 U2.41_6 U2.41_16 ; U2.41_9 U2.41_21 ; U2.41_13 U2.41_2 U2.41_10 ; U2.41_18 U2.41_5 U2.41_15 ; U2.41_8 U2.41_20 ; U2.41_1 U2.41_12 ; U2.41_4 U2.41_17 U2.41_7 ; J2.Shell@31.175,35.05 20.325,35.05 20.325,30.55 21.84,30.55 ; C12.1 31.905,1.558 v1(32.897,1.558) ; C11.2 34.347,3.681 v1(34.372,3.656) ; U2.1 38.32,8.43 P1.1 ; v1(40.345,28.724) 40.65,29.029 J1.A12/B1 ; TP2.1 v1(43.717,3.181) ; D1.2 43.749,25.665 v1(43.751,25.666) ; v1(45.184,15.414) 45.6,15.831 MT1.1 ; J1.A1/B12 46.85,29.236 v1(47.5,28.586) ; MT1.6 47.262,17.414 ; MT1.7 47.262,17.414 ; v1(48.07,17.44) 48.045,17.414 47.262,17.414 ; v1(49.25,14.179) C5.2 ; v1(49.25,17.36) C6.1 ; C7.1 v1(50.411,13.054) ; C8.1 50,30.294 v1(50.009,30.302) ; R13.2 v1(50,33.667) ; 21.84,30.55 22.047,30.55 22.321,30.276
GPIO1: J2.6 U2.39 | length 31.9
  Top w0.152: U2.39 23.057,9.7 v1(23.207,9.55) ; J2.6 24.159,29.509 24.159,30.524 v1(24.185,30.55)
  Bottom w0.152: v1(23.207,9.55) 21.75,11.007 21.75,29.122 22.721,30.092 22.721,32.185 22.871,32.335 24.035,32.335 24.185,32.185 v1(24.185,30.55)
GPIO38: J2.18 U2.31 | length 35.9
  Top w0.152: U2.31 v1(22.33,19.86) ; J2.18 v1(28.95,30.55)
  Bottom w0.152: v1(22.33,19.86) 22.33,19.766 22.047,19.483 22.047,16.318 24.264,14.1 31.35,14.1 31.975,14.725 31.975,17.75 29.955,19.77 29.955,29.545 v1(28.95,30.55)
GPIO39: J2.14 U2.32 | length 24.1
  Top w0.152: U2.32 v1(24.875,18.59) ; J2.14 v1(27.35,31.225)
  Bottom w0.152: v1(24.875,18.59) 27.816,18.59 29.035,19.809 29.035,27.536 28.55,28.022 28.55,30.025 v1(27.35,31.225)
I2C_SCL: MT1.13 R4.1 U2.17 | length 27.3
  Top w0.152: v1(32.495,24.94) U2.17 ; v1(44.37,17.013) 44.464,17.013 44.574,17.123 45.396,17.123 MT1.13
  Bottom w0.152: v1(32.495,24.94) 40.27,24.94 42.142,23.068 42.142,19.241 v1(44.37,17.013) 44.304,17.08 44.304,17.39 44.304,20.204 45.6,21.5 R4.1
I2C_SDA: MT1.14 R5.1 U2.12 | length 27.1
  Top w0.152: v1(35.555,22.4) U2.12 ; v1(44.29,15.857) 45.094,16.661 45.434,16.661 MT1.14
  Bottom w0.152: v1(35.555,22.4) 35.555,22.977 37.05,24.472 40.343,24.472 41.748,23.066 41.748,18.399 v1(44.29,15.857) 44.29,12.441 46.481,10.25 R5.1
LED_CONTROL: J2.12 U2.38 | length 39
  Top w0.152: U2.38 23.123,10.97 v1(23.207,11.055) ; J2.12 26.55,31.98 v1(26.749,32.179)
  Bottom w0.152: v1(23.207,11.055) 23.292,10.97 30.04,10.97 32.303,13.233 32.303,17.5 32.303,17.817 30.53,19.59 30.53,29.422 30.169,29.783 30.169,30.181 28.015,32.335 26.905,32.335 v1(26.749,32.179)
NetC3_2: C3.2 R1.1 R2.2 U1.1 | length 6.9
  Top w0.152: C3.2 10.1,12.975 U1.1 11.5,14.847 11.9,14.447 R2.2 R1.1
NetC12_2: C12.2 R9.1 R10.2 U3.5 | length 9.6
  Top w0.152: v1(27.415,1.607) 27.824,2.016 27.868,2.016 ; U3.5 27.742,2.142 27.868,2.016 ; C12.2 28.331,1.553 27.868,2.016
  Bottom w0.152: R10.2@24.255,4.955 R9.1 25.5,3.181 27.074,1.607 v1(27.415,1.607)
NetD1_1: D1.1 R15.2 | length 2.3
  Top w0.152: D1.1 44.249,25.329 44.5,25.579 R15.2
NetD1_3: D1.3 R16.2 | length 2.3
  Top w0.152: R16.2 43,25.579 43.249,25.33 D1.3
NetJ1_1: J1.1 J1.2 J1.3 J1.4 J1.5 J1.6 R13.1 | length 18.7
  Top w0.152: J1.2 J1.6 J1.5 J1.4 J1.3 J1.1 48.927,30.212 R13.1
NetJ1_A5: J1.A5 R3.2 | length 2.8
  Top w0.152: v1(44.912,30.825) 45.053,30.685 45.5,30.685 J1.A5
  Bottom w0.152: v1(44.912,30.825) 45.15,31.063 R3.2
NetJ1_A6: J1.A6 J1.B6 R16.1 | length 2.8
  Top w0.152: R16.1 43,28.51 43.5,29.01 J1.B6 J1.A6
NetJ1_A7: J1.A7 J1.B7 R15.1 | length 4.9
  Top w0.152: J1.A7 43,30.379 43.234,30.614 43.749,30.614 ; 43.751,30.614 44.025,30.614 44.249,30.614 44.5,30.363 J1.B7 R15.1
NetJ1_B5: J1.B5 R11.2 | length 2.8
  Top w0.152: J1.B5 v1(42.5,30.79)
  Bottom w0.152: R11.2 41.75,31.145 41.892,31.003 42.288,31.003 v1(42.5,30.79)
NetR8_1: R8.1 U3.4 | length 3.2
  Top w0.152: R8.1 26.384,1.607 26.793,2.016 U3.4
NetR12_1: R12.1 U2.19 | length 8.4
  Top w0.152: U2.19 29.955,27.045 33.305,30.395 34.975,30.395 R12.1@35.805,31.225
NetR14_1: R14.1 U2.20 | length 7.2
  Top w0.152: U2.20 28.685,26.7 30.785,28.8 31.315,28.8 33,30.485 R14.1
RST_PIN: J2.3 U2.35 | length 20.9
  Top w0.152: U2.35 19.33,14.75 22.7,14.75 25.455,17.505 25.455,18.88 v1(22.335,22) ; v1(22.95,27.779) J2.3
  Bottom w0.152: v1(22.335,22) 22.95,22.615 v1(22.95,27.779)
SD_CS: J2.19 U2.33 | length 20.8
  Top w0.152: U2.33 24.236,17.32 v1(24.255,17.301) ; v1(29.315,28.56) 29.341,28.586 29.341,29.491 J2.19
  Bottom w0.152: v1(24.255,17.301) 24.273,17.283 26.905,17.283 29.315,19.694 v1(29.315,28.56)
SPI_CS: J2.2 U2.18 | length 18.1
  Top w0.152: J2.2 22.55,28.21 21.84,27.5 20.636,27.5 20.15,27.014 20.15,25.666 20.164,25.666 20.326,25.504 20.326,25.146 20.5,24.972 30.897,24.972 31.225,25.3 U2.18
SPI_MISO: J2.15 U2.21 | length 9.9
  Top w0.152: U2.21 27.415,27.165 27.75,27.5 29.075,27.5 29.597,28.022 29.955,28.38 29.955,30.395 29.125,31.225 28.375,31.225 27.75,30.6 J2.15
SPI_MOSI: J2.8 R12.2 | length 15.4
  Top w0.152: J2.8 24.941,29.509 24.941,32.481 26.21,33.75 35.49,33.75 35.805,33.435 R12.2
SPI_SCK: J2.11 R14.2 | length 10.6
  Top w0.152: J2.11 26.15,32.71 26.697,33.257 32.303,33.257 R14.2
T_CS: J2.17 U2.22 | length 5
  Top w0.152: U2.22 26.145,27.095 26.829,27.779 28.019,27.779 28.55,28.31 J2.17
UART0.MCU_RX: P1.3 U2.37 | length 21.6
  Top w0.152: U2.37 19.34,12.28 20.705,12.28 21.175,12.75 30.88,12.75 31.882,12.75 32.66,11.972 v1(32.66,11.65)
  Bottom w0.152: v1(32.66,11.65) 35.2,14.19 P1.3
UART0.MCU_TX: P1.2 U2.36 | length 20.5
  Top w0.152: U2.36 20.788,13.51 21.168,13.13 27.657,13.13 31.33,13.13 32.001,13.13 v1@33.48,11.65
  Bottom w0.152: v1(33.48,11.65) P1.2
USB.USB_N: D1.6 U2.13 | length 10.3
  Top w0.152: U2.13 38.25,23.67 38.651,24.071 40.601,24.071 41.242,23.43 41.242,22.4 42.142,21.5 44,21.5 44.249,21.749 D1.6
USB.USB_P: D1.4 U2.14 | length 9.1
  Top w0.152: U2.14 38.212,24.94 38.68,24.472 38.696,24.472 38.819,24.35 40.72,24.35 41.524,23.546 41.524,22.513 42.258,21.779 43.127,21.779 43.249,21.901 D1.4
VBUS: C8.2 D1.5 J1.A4/B9 J1.B4/A9 | length 20.9
  Top w0.152: D1.5 43.749,23.23 43.583,23.396 42.985,23.396 42.982,23.393 42.687,23.393 42.288,23.792 42.288,28.214 41.4,29.102 J1.B4/A9 41.524,29.962 41.524,30.635 42.26,31.371 42.599,31.71 44.912,31.71 46.1,30.523 J1.A4/B9 46.1,29.061 47.25,27.911 C8.2
pads on no net: J1. J1.A8 J1.B8 MT1.2 MT1.3 MT1.10 MT1.11 U2.4 U2.7 U2.8 U2.9 U2.10 U2.11 U2.15 U2.16 U2.23 U2.24 U2.25 U2.26 U2.28 U3.3

## Polygon pours and split planes (outlines as drawn)
GND on Bottom "GND_L02_P002" (solid, pour order 2): 0,0 0,36.25 53,36.25 53,0
3V3 on Top "3V3_L01_P003" (solid, pour order 3): 0,0 0,36.25 53,36.25 53,0.204 52.796,0

## Silkscreen, mask and mechanical layers (free items; w line width, h text height)
Top Overlay:
  text "Screen" at 20.15,29.509 h1.5 r90
  text "JLCJLCJLCJLC" at 24.3,21.553 h0.8
  text "GND" at 37.998,4.705 h1.2
  text "ACC_INT1" at 46.762,4.516 h1.1 r90
  text "ACC_INT2" at 49.359,4.516 h1.1 r90
Bottom Overlay:
  text ".Projet_Titre" at 16.978,35.879 h3.5 r90
  text "0" at 9.065,34.177 h3.5 r90
  text ".Projet_nom_du_cours" at 39.616,29.387 h2
  text ".Projet_Concepteur2" at 28.75,25.089 h2 r90
  text ".Projet_Concepteur1" at 25.699,24.972 h2 r90
  text ".Projet_Date" at 31.75,23.5 h0.91 r90
  text "Conçu par :" at 20.5,22.75 h2 r90
Bottom Solder:
  drawing of 2 lines, arcs and shapes, not listed
Board Outline:
  the board outline again, w0.254

## Text inside footprints (layer, text, board x,y; h text height)
J2: Bottom Assembly "PCB Edge" at 27.581,36.956 h0.61 r180
REV1: Bottom Overlay "PCB REV #" at 33.605,24.211 h1 r90
SER1: Bottom Overlay "SERIAL #" at 33.363,18.188 h1 r90